# Altium PCB pcb.PcbDoc (part 5 of 9)
Units mil, origin at the board's own origin, x right, y up, seen from the top; angles counter-clockwise.
Board outline 3937.01 x 3937.01 mil, 4 copper layers (Top Layer, Ground plane, Power plane, Bottom Layer), stack 51.4 mil thick; 310 components, 276 nets, 1704 pads, 977 vias.
Unrouted connection lines stored in the file: 44.
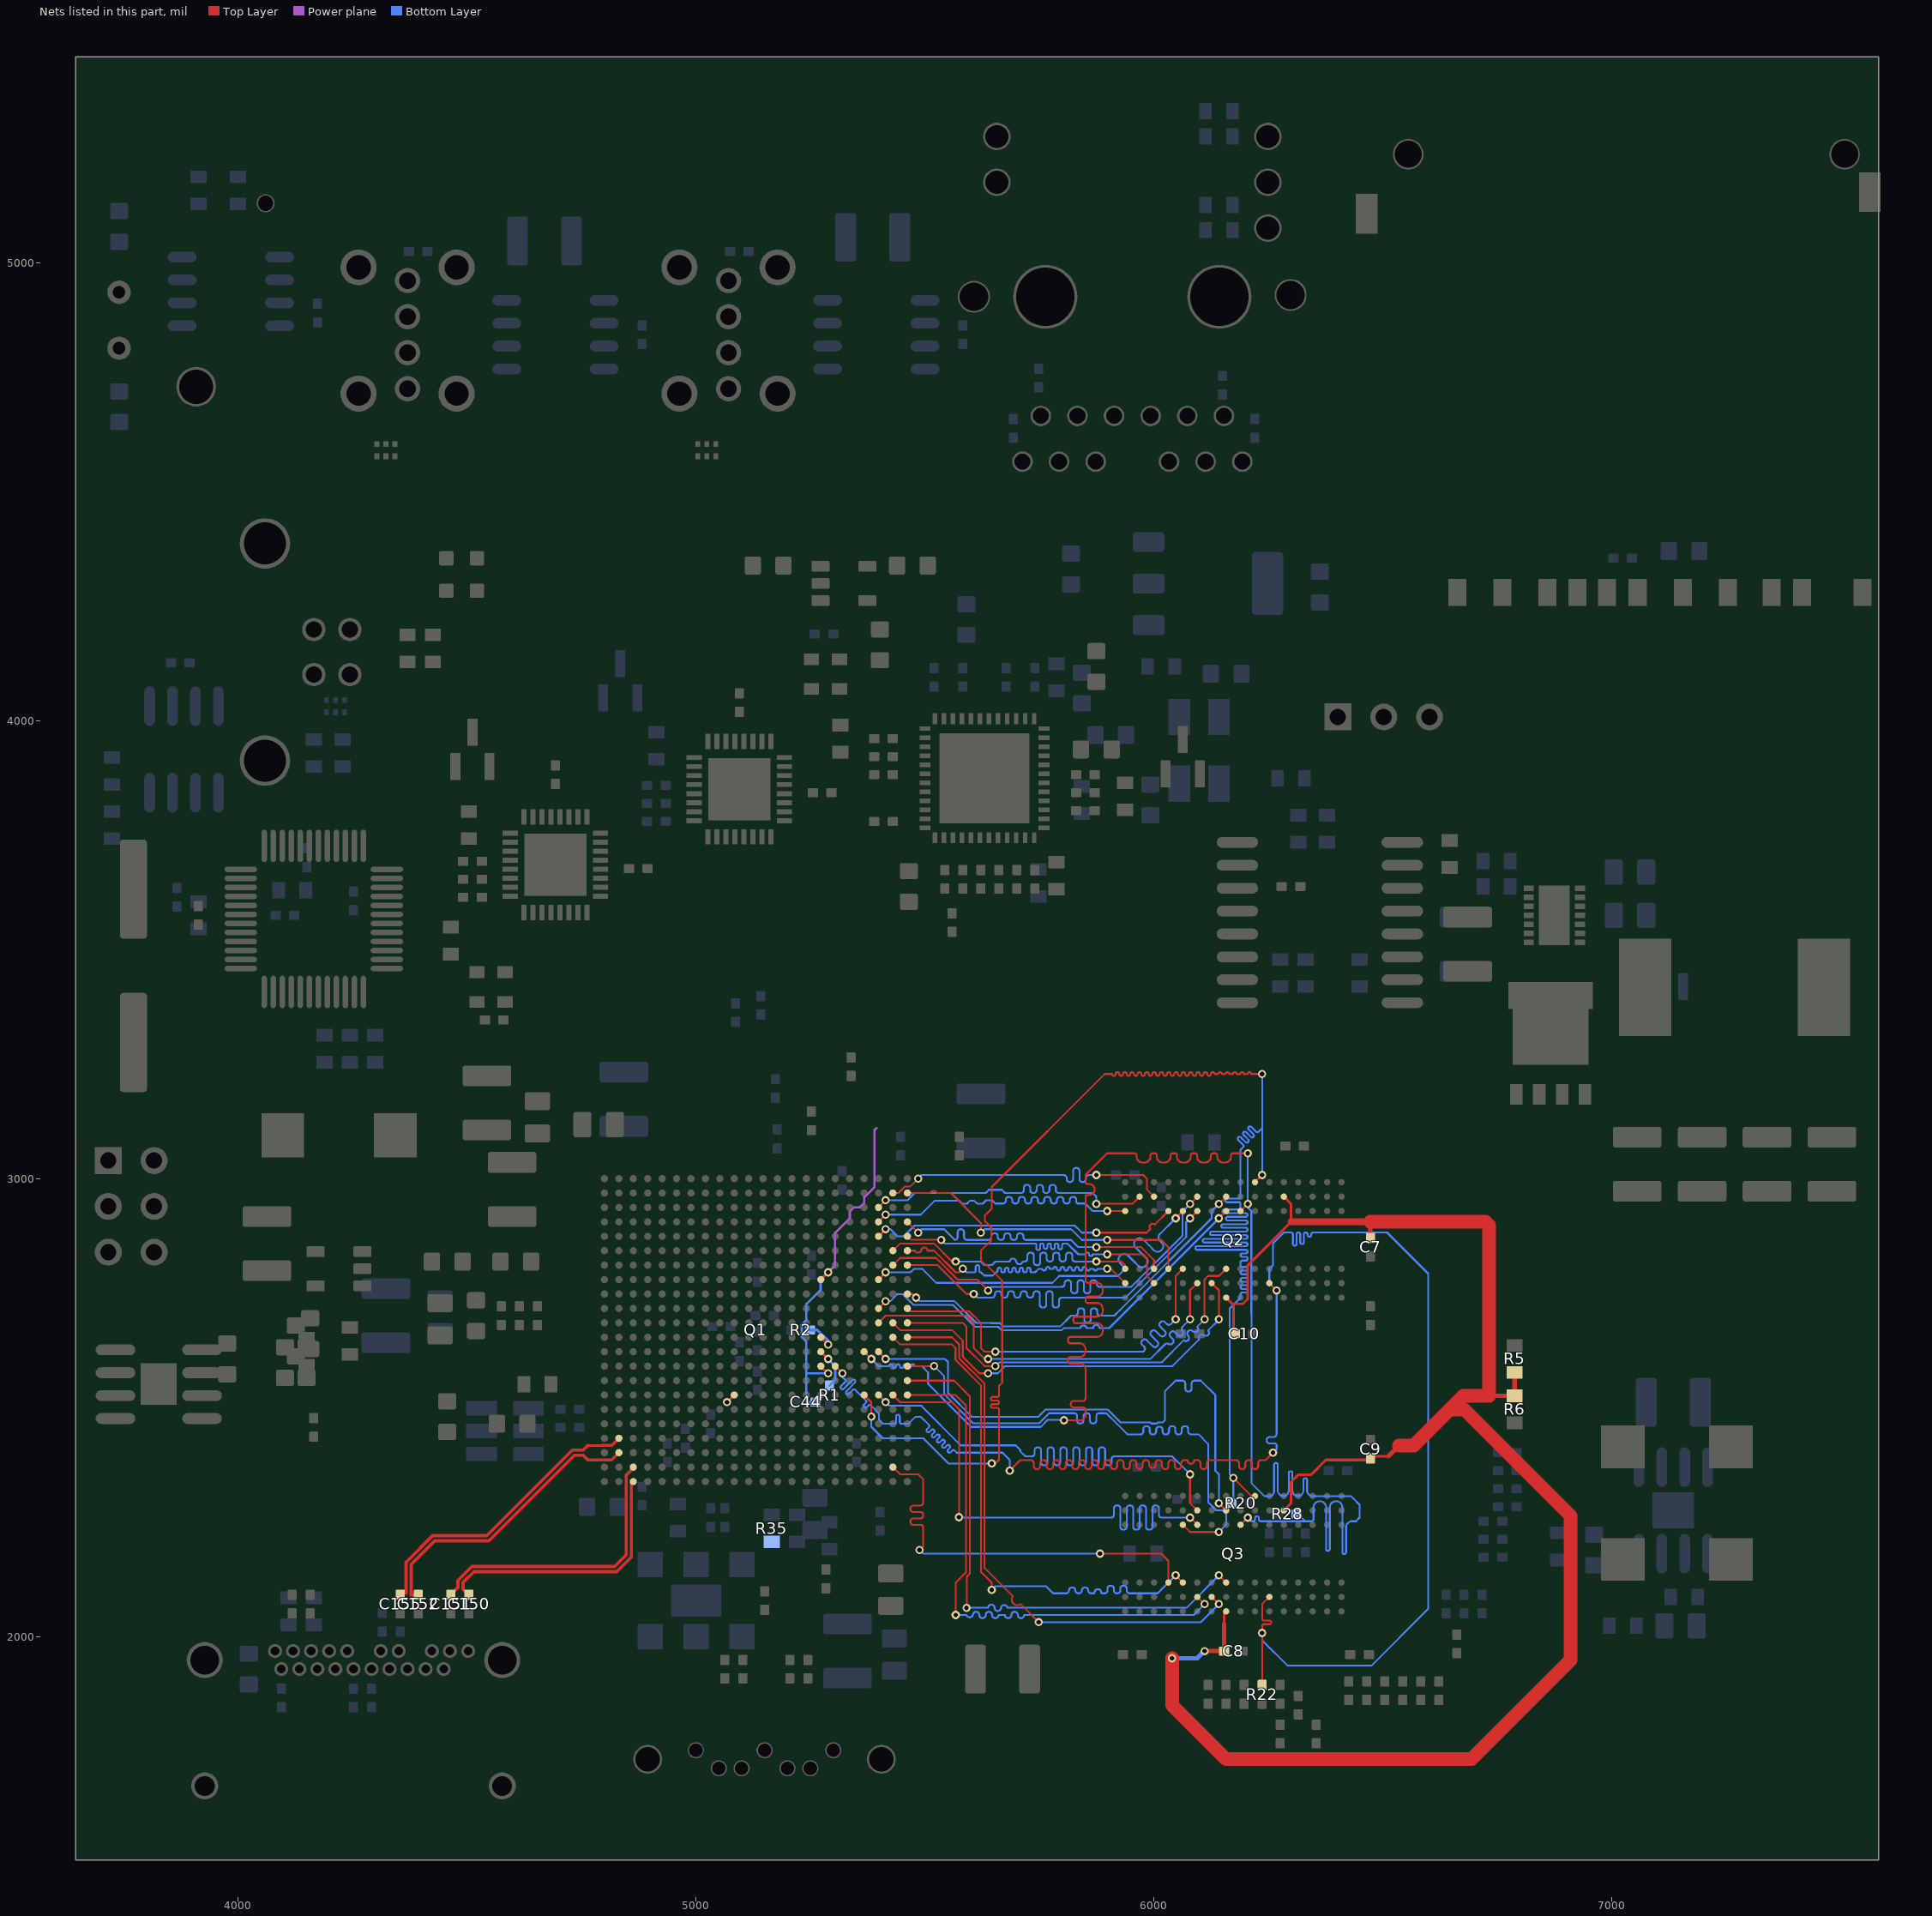
[diagram p6: the nets of this part, all layers, seen from the top]

## Via types
v1: diameter 18, hole 10, Top Layer to Bottom Layer, 932 vias
v2: diameter 19.68, hole 9.84, Top Layer to Bottom Layer, tented both sides, 18 vias
v3: diameter 19.68, hole 9.84, Top Layer to Bottom Layer, 16 vias
v4: diameter 19.68, hole 7.87, Top Layer to Bottom Layer, 11 vias

## Nets (pads, with @x,y where several pads share a name; then routed paths per layer and width w, separated by ;. In a path a pad name is that pad's centre, name@x,y a point inside that pad or via, vN(x,y) a via of type N, cw(c..) or ccw(c..) an arc to the next point about the centre after c; other vN are vias at no path point) (continued)
CK_P: Q1.N19 Q2.J7 Q3.J7 R28.1 | length 4126
  Top Layer w4: Q1.N19@5366.93,2622.05 v1(5382.68,2606.3) ; v1(5803.15,2472.44) 5842.52,2472.44 5850.39,2480.31 5850.39,2494.83 ccw(c5844.79,2494.83) 5844.79,2500.43 5824.09,2500.43 cw(c5824.09,2506.03) 5818.49,2506.03 5818.49,2508.83 cw(c5824.09,2508.83) 5824.09,2514.43 5844.79,2514.43 ccw(c5844.79,2520.03) 5850.39,2520.03 5850.39,2551.99 5850.39,2559.99 5850.39,2583.59 ccw(c5837.58,2583.59) 5837.58,2596.4 5817.43,2596.4 cw(c5817.43,2601.2) 5812.64,2601.2 5812.64,2605.6 cw(c5817.43,2605.6) 5817.43,2610.4 5837.58,2610.4 ccw(c5837.58,2623.22) 5850.39,2623.22 5850.39,2627.62 ccw(c5837.58,2627.62) 5837.58,2640.43 5817.43,2640.43 cw(c5817.43,2645.23) 5812.64,2645.23 5812.64,2649.64 cw(c5817.43,2649.64) 5817.43,2654.43 5875.34,2654.43 ccw(c5875.34,2667.25) 5888.15,2667.25 5888.15,2671.65 ccw(c5875.34,2671.65) 5875.34,2684.46 5828.82,2684.46 cw(c5828.82,2689.26) 5824.02,2689.26 5824.02,2693.67 cw(c5828.82,2693.67) 5828.82,2698.46 5875.34,2698.46 ccw(c5875.34,2711.28) 5888.15,2711.28 5888.15,2715.68 ccw(c5875.34,2715.68) 5875.34,2728.5 5855.19,2728.5 cw(c5855.19,2733.29) 5850.39,2733.29 5850.39,2737.7 cw(c5855.19,2737.7) 5855.19,2742.5 5875.34,2742.5 ccw(c5875.34,2755.31) 5888.15,2755.31 5888.15,2759.71 ccw(c5875.34,2759.71) 5875.34,2772.53 5855.19,2772.53 cw(c5855.19,2777.33) 5850.39,2777.33 5850.39,2834.65 5850.39,2960.13 cw(c5854.39,2960.13) 5854.39,2964.13 5858.39,2964.13 ccw(c5858.39,2976.13) 5870.39,2976.13 ccw(c5858.39,2976.13) 5858.39,2988.13 5854.39,2988.13 cw(c5854.39,2992.13) 5850.39,2992.13 5850.39,3007.87 5897.64,3055.12 5957.3,3055.12 cw(c5957.3,3050.32) 5962.1,3050.32 5962.1,3047.92 ccw(c5974.9,3047.92) 5974.9,3035.12 5979.3,3035.12 ccw(c5979.3,3047.92) 5992.1,3047.92 5992.1,3050.32 cw(c5996.9,3050.32) 5996.9,3055.12 6001.3,3055.12 cw(c6001.3,3050.32) 6006.1,3050.32 6006.1,3047.92 ccw(c6018.9,3047.92) 6018.9,3035.12 6023.3,3035.12 ccw(c6023.3,3047.92) 6036.1,3047.92 6036.1,3050.32 cw(c6040.9,3050.32) 6040.9,3055.12 6045.3,3055.12 cw(c6045.3,3050.32) 6050.1,3050.32 6050.1,3047.92 ccw(c6062.9,3047.92) 6062.9,3035.12 6067.3,3035.12 ccw(c6067.3,3047.92) 6080.1,3047.92 6080.1,3050.32 cw(c6084.9,3050.32) 6084.9,3055.12 6089.3,3055.12 cw(c6089.3,3050.32) 6094.1,3050.32 6094.1,3047.92 ccw(c6106.9,3047.92) 6106.9,3035.12 6111.3,3035.12 ccw(c6111.3,3047.92) 6124.1,3047.92 6124.1,3050.32 cw(c6128.9,3050.32) 6128.9,3055.12 6133.3,3055.12 cw(c6133.3,3050.32) 6138.1,3050.32 6138.1,3047.92 ccw(c6150.9,3047.92) 6150.9,3035.12 6155.3,3035.12 ccw(c6155.3,3047.92) 6168.1,3047.92 6168.1,3050.32 cw(c6172.9,3050.32) 6172.9,3055.12 v1(6204.72,3055.12) ; Q3.J7@6188.98,2244.09 v1(6204.72,2259.84) ; Q2.J7@6188.98,2929.13 v1(6204.72,2944.88)
  Bottom Layer w4: v1(5382.68,2606.3) 5398.43,2590.55 5421.04,2590.55 cw(c5425.04,2590.55) 5429.04,2590.55 ccw(c5433.04,2590.55) 5437.04,2590.55 cw(c5441.04,2590.55) 5445.04,2590.55 ccw(c5449.04,2590.55) 5453.04,2590.55 cw(c5457.04,2590.55) 5461.04,2590.55 ccw(c5465.04,2590.55) 5469.04,2590.55 cw(c5473.04,2590.55) 5477.04,2590.55 5492.91,2590.55 5506.66,2576.8 5506.66,2551.9 5600.73,2457.83 5752.69,2457.83 5768.33,2473.47 5794.24,2473.47 5795.28,2472.44 v1(5803.15,2472.44) ; v1(6204.72,2259.84) 6212.6,2251.97 6216.79,2251.97 ccw(c6216.79,2255.97) 6220.79,2255.97 6220.79,2258.79 cw(c6224.79,2258.79) 6224.79,2262.79 cw(c6224.79,2258.79) 6228.79,2258.79 6228.79,2255.97 ccw(c6232.79,2255.97) 6232.79,2251.97 6240.79,2251.97 6251.97,2251.97 6330.71,2251.97 ; v1(6204.72,3055.12) v1(6204.72,2944.88) 6204.72,2937.01 6212.6,2929.13 6212.6,2704.23 6212.72,2704.1 6212.72,2335.02 6240.78,2306.96 6251.97,2306.96 ccw(c6251.97,2317.2) 6262.2,2317.2 6262.2,2375.34 cw(c6266.2,2375.34) 6270.2,2375.34 6270.2,2318.96 ccw(c6282.2,2318.96) 6294.2,2318.96 6294.2,2357.03 cw(c6298.2,2357.03) 6302.2,2357.03 6302.2,2318.96 ccw(c6314.2,2318.96) 6326.2,2318.96 6326.2,2342.21 cw(c6330.2,2342.21) 6334.2,2342.21 6334.2,2318.96 ccw(c6346.2,2318.96) 6346.2,2306.96 6429.76,2306.96 6435.29,2301.43 6448.82,2287.9 6448.82,2259.84 6440.94,2251.97 6433.07,2251.97 ccw(c6433.07,2238.22) 6419.32,2238.22 6419.32,2184.36 cw(c6415.32,2184.36) 6411.32,2184.36 6411.32,2281.9 ccw(c6397.57,2281.9) 6383.83,2281.9 6383.83,2191.06 cw(c6379.83,2191.06) 6375.83,2191.06 6375.83,2281.9 ccw(c6362.08,2281.9) 6348.33,2281.9 6348.33,2255.97 cw(c6344.33,2255.97) 6344.33,2251.97 6330.71,2251.97 ; R28.1@6311.61,2275.59 6311.61,2271.06 6330.71,2251.97
CKE: Q1.T19 Q2.K9 Q3.K9 R20.1 | length 4253.8
  Top Layer w4: Q1.T19@5366.93,2527.56 5382.68,2511.81 v1(5382.68,2480.32) ; v1(5645.67,2377.95) 5653.54,2377.95 5661.66,2386.07 5661.66,2495.43 ccw(c5657.66,2495.43) 5657.66,2499.43 5647.8,2499.43 cw(c5647.8,2503.43) 5643.8,2503.43 cw(c5647.8,2503.43) 5647.8,2507.43 5657.66,2507.43 ccw(c5657.66,2511.43) 5661.66,2511.43 ccw(c5657.66,2511.43) 5657.66,2515.43 5647.8,2515.43 cw(c5647.8,2519.43) 5643.8,2519.43 cw(c5647.8,2519.43) 5647.8,2523.43 5657.66,2523.43 ccw(c5657.66,2527.43) 5661.66,2527.43 5661.66,2547.49 5668.66,2554.49 5668.66,2776.87 5633.76,2811.77 5631.58,2811.77 5622.05,2821.31 5622.05,2842.52 5644.8,2865.27 5644.8,2892.79 5630.54,2907.05 5630.54,2919.47 5645.67,2934.6 5645.67,2981.72 5892.3,3228.35 5908.22,3228.35 ccw(c5912.22,3228.35) 5916.22,3228.35 cw(c5920.22,3228.35) 5924.22,3228.35 ccw(c5928.22,3228.35) 5932.22,3228.35 cw(c5936.22,3228.35) 5940.22,3228.35 ccw(c5944.22,3228.35) 5948.22,3228.35 cw(c5952.22,3228.35) 5956.22,3228.35 ccw(c5960.22,3228.35) 5964.22,3228.35 cw(c5968.22,3228.35) 5972.22,3228.35 ccw(c5976.22,3228.35) 5980.22,3228.35 cw(c5984.22,3228.35) 5988.22,3228.35 ccw(c5992.22,3228.35) 5996.22,3228.35 cw(c6000.22,3228.35) 6004.22,3228.35 ccw(c6008.22,3228.35) 6012.22,3228.35 cw(c6016.22,3228.35) 6020.22,3228.35 ccw(c6024.22,3228.35) 6028.22,3228.35 cw(c6032.22,3228.35) 6036.22,3228.35 ccw(c6040.22,3228.35) 6044.22,3228.35 cw(c6048.22,3228.35) 6052.22,3228.35 ccw(c6056.22,3228.35) 6060.22,3228.35 cw(c6064.22,3228.35) 6068.22,3228.35 ccw(c6072.22,3228.35) 6076.22,3228.35 cw(c6080.22,3228.35) 6084.22,3228.35 ccw(c6088.22,3228.35) 6092.22,3228.35 cw(c6096.22,3228.35) 6100.22,3228.35 ccw(c6104.22,3228.35) 6108.22,3228.35 cw(c6112.22,3228.35) 6116.22,3228.35 ccw(c6120.22,3228.35) 6124.22,3228.35 cw(c6128.22,3228.35) 6132.22,3228.35 6140.22,3228.35 cw(c6144.22,3228.35) 6148.22,3228.35 6156.22,3228.35 cw(c6160.22,3228.35) 6164.22,3228.35 6172.22,3228.35 cw(c6176.22,3228.35) 6180.22,3228.35 6188.22,3228.35 cw(c6192.22,3228.35) 6196.22,3228.35 6204.22,3228.35 cw(c6208.22,3228.35) 6212.22,3228.35 v1(6236.22,3228.35) ; v1(6173.23,2346.46) 6212.6,2307.09 Q3.K9@6220.47,2307.09 ; Q2.K9@6220.47,2992.13 v1(6236.22,3007.87)
  Bottom Layer w4: v1(5382.68,2480.32) 5382.68,2458.31 5407.92,2433.07 5496.06,2433.07 5551.18,2377.95 v1(5645.67,2377.95) ; R20.1@6168.7,2291.34 6173.23,2295.87 v1(6173.23,2346.46) 6165.23,2354.46 6165.23,2716.41 6188.98,2740.16 6188.98,2747.02 cw(c6192.98,2747.02) 6192.98,2751.02 6200.6,2751.02 ccw(c6200.6,2755.02) 6204.6,2755.02 ccw(c6200.6,2755.02) 6200.6,2759.02 6192.98,2759.02 cw(c6192.98,2763.02) 6188.98,2763.02 cw(c6192.98,2763.02) 6192.98,2767.02 6200.6,2767.02 ccw(c6200.6,2771.02) 6204.6,2771.02 ccw(c6200.6,2771.02) 6200.6,2775.02 6192.98,2775.02 cw(c6192.98,2779.02) 6188.98,2779.02 cw(c6192.98,2779.02) 6192.98,2783.02 6200.6,2783.02 ccw(c6200.6,2787.02) 6204.6,2787.02 ccw(c6200.6,2787.02) 6200.6,2791.02 6192.98,2791.02 cw(c6192.98,2795.02) 6188.98,2795.02 cw(c6192.98,2795.02) 6192.98,2799.02 6200.6,2799.02 ccw(c6200.6,2803.02) 6204.6,2803.02 ccw(c6200.6,2803.02) 6200.6,2807.02 6192.98,2807.02 cw(c6192.98,2811.02) 6188.98,2811.02 6188.98,2817.01 cw(c6192.98,2817.01) 6192.98,2821.01 6200.6,2821.01 ccw(c6200.6,2825.01) 6204.6,2825.01 ccw(c6200.6,2825.01) 6200.6,2829.01 6192.98,2829.01 cw(c6192.98,2833.01) 6188.98,2833.01 cw(c6192.47,2833.01) 6192.47,2836.5 6200.25,2836.5 ccw(c6200.25,2840.5) 6204.25,2840.5 ccw(c6200.25,2840.5) 6200.25,2844.5 6094.17,2844.5 cw(c6094.17,2848.5) 6090.17,2848.5 cw(c6094.17,2848.5) 6094.17,2852.5 6200.25,2852.5 ccw(c6200.25,2856.5) 6204.25,2856.5 ccw(c6200.25,2856.5) 6200.25,2860.5 6110.17,2860.5 cw(c6110.17,2864.5) 6106.17,2864.5 cw(c6110.17,2864.5) 6110.17,2868.5 6200.25,2868.5 ccw(c6200.25,2872.5) 6204.25,2872.5 ccw(c6200.25,2872.5) 6200.25,2876.5 6126.17,2876.5 cw(c6126.17,2880.5) 6122.17,2880.5 cw(c6126.17,2880.5) 6126.17,2884.5 6200.25,2884.5 ccw(c6200.25,2888.5) 6204.25,2888.5 ccw(c6200.25,2888.5) 6200.25,2892.5 6150.8,2892.5 cw(c6150.8,2896.5) 6146.8,2896.5 cw(c6150.8,2896.5) 6150.8,2900.5 6200.25,2900.5 ccw(c6200.25,2904.5) 6204.25,2904.5 ccw(c6200.25,2904.5) 6200.25,2908.5 6161.06,2908.5 cw(c6161.06,2912.5) 6157.06,2912.5 cw(c6161.06,2912.5) 6161.06,2916.5 6200.25,2916.5 ccw(c6200.25,2920.5) 6204.25,2920.5 ccw(c6200.25,2920.5) 6200.25,2924.5 6153.59,2924.5 cw(c6153.59,2928.5) 6149.59,2928.5 cw(c6153.59,2928.5) 6153.59,2932.5 6184.98,2932.5 ccw(c6184.98,2936.5) 6188.98,2936.5 6188.98,2944.5 ccw(c6184.98,2944.5) 6184.98,2948.5 6159.13,2948.5 cw(c6159.13,2952.5) 6155.13,2952.5 cw(c6159.13,2952.5) 6159.13,2956.5 6184.98,2956.5 ccw(c6184.98,2960.5) 6188.98,2960.5 6188.98,3062.99 6194.41,3068.42 ccw(c6191.58,3071.25) 6194.41,3074.08 6184.02,3084.46 cw(c6186.85,3087.29) 6184.02,3090.12 cw(c6186.85,3087.29) 6189.68,3090.12 6200.06,3079.73 ccw(c6202.89,3082.56) 6205.72,3079.73 ccw(c6202.89,3082.56) 6205.72,3085.39 6195.34,3095.77 cw(c6198.17,3098.6) 6195.34,3101.43 cw(c6198.17,3098.6) 6200.99,3101.43 6211.38,3091.05 ccw(c6214.2,3093.88) 6217.03,3091.05 ccw(c6214.2,3093.88) 6217.03,3096.71 6206.65,3107.09 cw(c6209.48,3109.92) 6206.65,3112.74 cw(c6209.48,3109.92) 6212.31,3112.74 6222.69,3102.36 ccw(c6225.52,3105.19) 6228.35,3102.36 6236.22,3110.24 ; v1(6236.22,3007.87) 6236.22,3110.24 ; v1(6236.22,3228.35) 6236.22,3110.24
CS: Q1.P17 Q2.L2 Q3.L2 R22.1 | length 4204.7
  Top Layer w4: Q1.P17@5303.94,2590.55 v1(5319.69,2574.8) ; v1(5685.04,2362.2) 5708.41,2385.57 5730.54,2385.57 cw(c5730.54,2378.57) 5737.54,2378.57 5737.54,2372.57 ccw(c5744.54,2372.57) 5744.54,2365.57 ccw(c5744.54,2372.57) 5751.54,2372.57 5751.54,2378.57 cw(c5758.54,2378.57) 5758.54,2385.57 cw(c5758.54,2378.57) 5765.54,2378.57 5765.54,2372.57 ccw(c5772.54,2372.57) 5772.54,2365.57 ccw(c5772.54,2372.57) 5779.54,2372.57 5779.54,2378.57 cw(c5786.54,2378.57) 5786.54,2385.57 cw(c5786.54,2378.57) 5793.54,2378.57 5793.54,2372.57 ccw(c5800.54,2372.57) 5800.54,2365.57 ccw(c5800.54,2372.57) 5807.54,2372.57 5807.54,2378.57 cw(c5814.54,2378.57) 5814.54,2385.57 cw(c5814.54,2378.57) 5821.54,2378.57 5821.54,2372.57 ccw(c5828.54,2372.57) 5828.54,2365.57 ccw(c5828.54,2372.57) 5835.54,2372.57 5835.54,2378.57 cw(c5842.54,2378.57) 5842.54,2385.57 cw(c5842.54,2378.57) 5849.54,2378.57 5849.54,2372.57 ccw(c5856.54,2372.57) 5856.54,2365.57 ccw(c5856.54,2372.57) 5863.54,2372.57 5863.54,2378.57 cw(c5870.54,2378.57) 5870.54,2385.57 cw(c5870.54,2378.57) 5877.54,2378.57 5877.54,2372.57 ccw(c5884.54,2372.57) 5884.54,2365.57 ccw(c5884.54,2372.57) 5891.54,2372.57 5891.54,2378.57 cw(c5898.54,2378.57) 5898.54,2385.57 cw(c5898.54,2378.57) 5905.54,2378.57 5905.54,2372.57 ccw(c5912.54,2372.57) 5912.54,2365.57 ccw(c5912.54,2372.57) 5919.54,2372.57 5919.54,2378.57 cw(c5926.54,2378.57) 5926.54,2385.57 cw(c5926.54,2378.57) 5933.54,2378.57 5933.54,2372.57 ccw(c5940.54,2372.57) 5940.54,2365.57 ccw(c5940.54,2372.57) 5947.54,2372.57 5947.54,2378.57 cw(c5954.54,2378.57) 5954.54,2385.57 cw(c5954.54,2378.57) 5961.54,2378.57 5961.54,2373.06 ccw(c5968.54,2373.06) 5968.54,2366.06 ccw(c5968.54,2373.06) 5975.54,2373.06 5975.54,2378.57 cw(c5982.54,2378.57) 5982.54,2385.57 cw(c5982.54,2378.57) 5989.54,2378.57 5989.54,2375.17 ccw(c5996.54,2375.17) 5996.54,2368.17 ccw(c5996.54,2375.17) 6003.54,2375.17 6003.54,2378.57 cw(c6010.54,2378.57) 6010.54,2385.57 cw(c6010.54,2378.57) 6017.54,2378.57 6017.54,2372.57 ccw(c6024.54,2372.57) 6024.54,2365.57 ccw(c6024.54,2372.57) 6031.54,2372.57 6031.54,2378.57 cw(c6038.54,2378.57) 6038.54,2385.57 cw(c6038.54,2378.57) 6045.54,2378.57 6045.54,2372.57 ccw(c6052.54,2372.57) 6052.54,2365.57 ccw(c6052.54,2372.57) 6059.54,2372.57 6059.54,2378.57 cw(c6066.54,2378.57) 6066.54,2385.57 6072.29,2385.57 cw(c6072.29,2384.33) 6073.54,2384.33 ccw(c6080.54,2384.33) 6080.54,2377.33 ccw(c6080.54,2384.33) 6087.54,2384.33 cw(c6088.78,2384.33) 6088.78,2385.57 6094.54,2385.57 cw(c6094.54,2378.57) 6101.54,2378.57 6101.54,2372.57 ccw(c6108.54,2372.57) 6108.54,2365.57 ccw(c6108.54,2372.57) 6115.54,2372.57 6115.54,2378.57 cw(c6122.54,2378.57) 6122.54,2385.57 6178.54,2385.57 cw(c6178.54,2378.57) 6185.54,2378.57 6185.54,2372.57 ccw(c6192.54,2372.57) 6192.54,2365.57 ccw(c6192.54,2372.57) 6199.54,2372.57 6199.54,2378.57 cw(c6206.54,2378.57) 6206.54,2385.57 cw(c6206.54,2378.57) 6213.54,2378.57 6213.54,2372.57 ccw(c6220.54,2372.57) 6220.54,2365.57 ccw(c6220.54,2372.57) 6227.54,2372.57 6227.54,2378.57 cw(c6234.54,2378.57) 6234.54,2385.57 6243.84,2385.57 v1(6259.84,2401.57) ; R22.1@6236.22,1897.64 v1(6236.22,2007.87) 6236.22,2023.12 cw(c6240.22,2023.12) 6240.22,2027.12 6252.03,2027.12 ccw(c6252.03,2031.12) 6256.03,2031.12 ccw(c6252.03,2031.12) 6252.03,2035.12 6240.22,2035.12 cw(c6240.22,2039.12) 6236.22,2039.12 6236.22,2070.87 Q3.L2@6251.97,2086.61 ; Q2.L2@6251.97,2771.65 v1(6267.72,2755.91)
  Bottom Layer w4: v1(5319.69,2574.8) 5319.69,2566.93 5325.34,2561.27 cw(c5322.51,2558.44) 5325.34,2555.61 5316.86,2547.13 ccw(c5319.69,2544.3) 5316.86,2541.47 ccw(c5319.69,2544.3) 5322.51,2541.47 5333.83,2552.79 5341.11,2560.07 cw(c5343.94,2557.24) 5346.77,2560.07 cw(c5343.94,2557.24) 5346.77,2554.41 5328.17,2535.82 ccw(c5331,2532.99) 5328.17,2530.16 ccw(c5331,2532.99) 5333.83,2530.16 5342.31,2538.64 cw(c5345.14,2535.82) 5347.97,2538.64 5370.6,2516.02 cw(c5367.77,2513.19) 5370.6,2510.36 5367.05,2506.81 ccw(c5369.88,2503.98) 5367.05,2501.16 ccw(c5369.88,2503.98) 5372.71,2501.16 5376.25,2504.7 cw(c5379.08,2501.87) 5381.91,2504.7 5399.17,2487.44 5399.17,2474.1 5408.71,2464.57 5432.71,2464.57 ccw(c5432.71,2468.57) 5436.71,2468.57 5436.71,2480.57 cw(c5440.71,2480.57) 5440.71,2484.57 cw(c5440.71,2480.57) 5444.71,2480.57 5444.71,2468.57 ccw(c5448.71,2468.57) 5448.71,2464.57 5463.83,2464.57 5478.83,2479.57 5491.25,2479.57 5508.22,2462.6 cw(c5505.39,2459.77) 5508.22,2456.94 5504.35,2453.07 ccw(c5507.18,2450.24) 5504.35,2447.41 ccw(c5507.18,2450.24) 5510.01,2447.41 5513.88,2451.28 cw(c5516.71,2448.45) 5519.54,2451.28 cw(c5516.71,2448.45) 5519.54,2445.63 5515.66,2441.75 ccw(c5518.49,2438.92) 5515.66,2436.1 ccw(c5518.49,2438.92) 5521.32,2436.1 5525.19,2439.97 cw(c5528.02,2437.14) 5530.85,2439.97 cw(c5528.02,2437.14) 5530.85,2434.31 5526.98,2430.44 ccw(c5529.81,2427.61) 5526.98,2424.78 ccw(c5529.81,2427.61) 5532.63,2424.78 5536.51,2428.66 cw(c5539.34,2425.83) 5542.16,2428.66 cw(c5539.34,2425.83) 5542.16,2423 5538.29,2419.13 ccw(c5541.12,2416.3) 5538.29,2413.47 ccw(c5541.12,2416.3) 5543.95,2413.47 5547.82,2417.34 cw(c5550.65,2414.51) 5553.48,2417.34 cw(c5550.65,2414.51) 5553.48,2411.68 5550.32,2408.53 ccw(c5553.15,2405.7) 5550.32,2402.87 ccw(c5553.15,2405.7) 5555.98,2402.87 5559.13,2406.03 cw(c5561.96,2403.2) 5564.79,2406.03 5569.12,2401.7 5669.17,2401.7 5685.04,2385.83 v1(5685.04,2362.2) ; v1(6236.22,2007.87) 6236.22,1992.13 6291.84,1936.5 6474.38,1936.5 6598.69,2060.81 6598.69,2792.61 6508.89,2882.4 6347.34,2882.4 ccw(c6347.34,2878.4) 6343.34,2878.4 6343.34,2877.02 cw(c6339.34,2877.02) 6339.34,2873.02 cw(c6339.34,2877.02) 6335.34,2877.02 6335.34,2878.4 ccw(c6331.34,2878.4) 6331.34,2882.4 ccw(c6331.34,2878.4) 6327.34,2878.4 6327.34,2861.02 cw(c6323.34,2861.02) 6323.34,2857.02 cw(c6323.34,2861.02) 6319.34,2861.02 6319.34,2878.4 ccw(c6315.34,2878.4) 6315.34,2882.4 ccw(c6315.34,2878.4) 6311.34,2878.4 6311.34,2857.44 cw(c6307.34,2857.44) 6307.34,2853.44 cw(c6307.34,2857.44) 6303.34,2857.44 6303.34,2878.4 ccw(c6299.34,2878.4) 6299.34,2882.4 6283.98,2882.4 6259.84,2858.27 6259.84,2811.02 6251.97,2803.15 6251.97,2771.65 v1(6267.72,2755.91) 6267.72,2442.69 cw(c6260.72,2442.69) 6260.72,2435.69 6252.77,2435.69 ccw(c6252.77,2428.69) 6245.77,2428.69 ccw(c6252.77,2428.69) 6252.77,2421.69 6263.35,2421.69 cw(c6263.35,2417.32) 6267.72,2417.32 6267.72,2409.45 v1(6259.84,2401.57)
D0_N: C151.2 Q1.AA3 | length 626.6
  Top Layer w7.2: C151.2@4464.57,2091.14 4480.31,2106.88 4480.31,2122.76 4510.5,2152.95 4822.24,2152.95 4847.52,2178.23 4847.52,2352.59 4862.99,2368.07 Q1.AA3@4862.99,2370.08
D0_P: C150.2 Q1.AB3 | length 589.1
  Top Layer w7.2: C150.2@4503.94,2091.14 4491.52,2103.56 4491.52,2118.11 4515.14,2141.73 4826.89,2141.73 4858.73,2173.58 4858.73,2334.32 Q1.AB3@4862.99,2338.58
D1_N: C155.2 Q1.W2 | length 644.2
  Top Layer w6: 4763.78,2417.32 4795.28,2417.32
  Top Layer w7.2: 4366.74,2094.49 4366.74,2162.13 4370.02,2165.41 4425.08,2220.47 4543.19,2220.47 4729.9,2407.18 4753.64,2407.18 4763.78,2417.32 ; 4795.55,2417.6 4816.02,2417.6 Q1.W2@4831.5,2433.07
D1_P: C152.2 Q1.Y2 | length 645.1
  Top Layer w6: 4763.78,2385.83 4795.28,2385.83
  Top Layer w7.2: C152.2@4393.7,2091.14 4377.94,2091.14 4377.94,2094.48 4377.95,2157.48 4429.73,2209.26 4547.84,2209.26 4734.55,2395.97 4753.64,2395.97 4763.78,2385.83 ; 4795.28,2385.83 4815.75,2385.83 Q1.Y2@4831.5,2401.57
DDRREF: C7.2 C8.2 C9.2 C10.2 C44.2 Q1.H16 Q1.P16 Q2.H1 Q2.M8 Q3.H1 Q3.M8 R5.2 R6.2 | length 4710.4
  Top Layer w5: Q1.P16@5272.44,2590.55 v1(5288.19,2574.8) ; Q1.H16@5272.44,2779.53 v1(5288.19,2795.28) ; C10.2@6173.48,2664.52 C10.2@6176.57,2661.42 ; 6173.48,2724.16 6170.87,2726.77 6194.52,2726.77 6204.72,2736.97 ; 6299.21,2905.51 6299.21,2944.88
  Top Layer w6: 6152.95,2026.97 6152.95,2050.59 Q3.H1@6157.48,2055.12 Q3.H1@6157.48,2051.18 ; Q2.H1@6157.48,2740.16 6170.87,2726.77 ; C10.2@6173.48,2664.52 6173.48,2724.16 ; 6204.72,2736.97 6204.72,2811.02 6299.21,2905.51 ; Q3.M8@6283.47,2275.59 6299.21,2291.34 6299.21,2337.46 6314.96,2353.2 6342.31,2353.2 6374.93,2385.83 6469.09,2385.83 C9.2@6472.44,2389.17 ; Q2.M8@6283.47,2960.63 6299.21,2944.88 ; C9.2@6476.97,2393.7 6511.81,2393.7
  Top Layer w10: v1(6110.24,1968.5) C8.2@6152.95,1968.5 6152.95,2026.97 ; C9.2@6472.44,2389.17 C9.2@6476.97,2393.7 ; C7.2@6472.44,2870.67 6472.44,2905.51 ; 6511.81,2393.7 6535.43,2417.32 ; 6731.3,2525.59 R6.2@6787.4,2525.59 R5.2@6787.4,2576.77
  Top Layer w15: 6299.21,2905.51 6472.44,2905.51 ; 6724.41,2905.51 6731.3,2898.62
  Top Layer w30: v1(6039.37,1952.76) 6039.37,1850.39 6157.48,1732.28 6692.91,1732.28 6909.89,1949.26 6909.89,2263.57 6677.39,2496.06 6645.67,2496.06 ; 6472.44,2905.51 6724.41,2905.51 ; 6535.43,2417.32 6566.93,2417.32 6645.67,2496.06 ; 6731.3,2898.62 6731.3,2525.59 6675.2,2525.59 6645.67,2496.06
  Power plane w5: v1(5288.19,2795.28) 5303.69,2810.77 5303.69,2881.64 5335.68,2913.63 5335.68,2928.18 5344.76,2937.26 5357.6,2937.26 5367.18,2946.84 5367.18,2959.18 5389.7,2981.7 5389.7,3106.24 5393.7,3110.24
  Bottom Layer w5: 5240.95,2574.8 v1(5288.19,2574.8) ; C44.2@5260.43,2511.81 5240.94,2511.81 5240.94,2643.97 5230.9,2654.01 5230.9,2680.67 5240.94,2690.72 5240.94,2726.11 5272.19,2757.36 5272.19,2779.28 v1(5288.19,2795.28)
  Bottom Layer w10: v1(6039.37,1952.76) 6094.49,1952.76 v1(6110.24,1968.5)
DDRVRN: Q1.M16 R2.2 | length 79.5
  Top Layer w5: Q1.M16@5272.44,2653.54 v1(5288.19,2637.79)
  Bottom Layer w5: v1(5288.19,2637.79) v1@5288.19,2645.67
  Bottom Layer w6: R2.2@5248.62,2669.29 5264.57,2669.29 v1@5288.19,2645.67
DDRVRP: Q1.N16 R1.2 | length 92.5
  Top Layer w5: Q1.N16@5272.44,2622.05 v1(5288.19,2606.3)
  Bottom Layer w5: v1(5288.19,2606.3) 5303.94,2590.55 5303.94,2560.43 R1.2@5291.34,2547.83
DM0: Q1.H20 Q2.E7 | length 925.3
  Top Layer w4: Q1.H20@5398.43,2779.53 v1(5414.17,2795.28) ; v1(6047.24,2913.39) Q2.E7@6062.99,2929.13
  Bottom Layer w4: v1(5414.17,2795.28) 5468.26,2795.28 5475.51,2802.53 5494.57,2802.53 5524.69,2772.4 5777.87,2772.4 5792.87,2787.4 5921.26,2787.4 5929.98,2796.12 ; 5929.99,2796.13 ccw(c5922.35,2803.76) 5929.99,2811.39 5925.55,2815.83 cw(c5933.19,2823.47) 5925.54,2831.1 5927.25,2832.8 cw(c5934.88,2825.17) 5942.52,2832.8 5954.59,2820.73 5966.15,2809.17 ccw(c5973.78,2816.81) 5981.42,2809.17 5983.12,2810.87 ccw(c5975.48,2818.51) 5983.12,2826.14 5971.56,2837.7 5959.49,2849.77 cw(c5967.13,2857.41) 5959.48,2865.04 5961.19,2866.74 cw(c5968.82,2859.11) 5976.46,2866.74 5988.53,2854.67 6000.09,2843.12 ccw(c6007.72,2850.75) 6015.35,2843.11 6017.06,2844.81 ccw(c6009.42,2852.45) 6017.07,2860.08 6013.14,2864.01 cw(c6020.77,2871.64) 6013.13,2879.27 ; 6013.14,2879.28 v1(6047.24,2913.39)
DM1: Q1.B22 Q2.D3 | length 689
  Top Layer w4: Q1.B22@5461.42,2968.5 5511.81,2968.5 cw(c5518.81,2965.56) 5525.81,2968.5 5556.65,2968.5 5622.05,2903.1 v1(5622.05,2881.89) ; v1(5897.64,2866.14) 6015.75,2866.14 6031.5,2850.39 Q2.D3@6031.5,2803.15
  Bottom Layer w4: v1(5622.05,2881.89) 5629.67,2889.51 5819.15,2889.51 5842.52,2866.14 v1(5897.64,2866.14) v1@5897.51,2866.02
DM2: Q1.P22 Q3.E7 | length 1239.9
  Top Layer w4: Q1.P22@5461.42,2590.55 v1(5519.68,2590.55) ; Q3.E7@6062.99,2244.09 6078.74,2228.35 v1(6141.73,2228.35)
  Bottom Layer w4: v1(5519.68,2590.55) 5542.05,2568.19 5542.05,2528.82 5605.04,2465.83 5749.37,2465.83 5771.23,2487.68 5825.72,2487.68 cw(c5825.72,2481.39) 5832.02,2481.39 5832.02,2471.74 ccw(c5838.32,2471.74) 5838.32,2465.44 5839.72,2465.44 ccw(c5839.72,2471.74) 5846.02,2471.74 5846.02,2481.39 cw(c5852.32,2481.39) 5852.32,2487.69 5853.72,2487.68 cw(c5853.72,2481.39) 5860.02,2481.39 5860.02,2471.74 ccw(c5866.32,2471.74) 5866.32,2465.44 5867.72,2465.44 ccw(c5867.72,2471.74) 5874.02,2471.74 5874.02,2481.39 cw(c5880.32,2481.39) 5880.32,2487.69 5895.73,2487.68 5919.27,2464.15 ; 5919.27,2464.11 5941.68,2441.7 5970.38,2441.7 ccw(c5970.38,2448) 5976.68,2448 5976.68,2453.13 cw(c5982.98,2453.13) 5982.98,2459.43 5984.38,2459.43 cw(c5984.38,2453.13) 5990.68,2453.13 5990.68,2448 ccw(c5996.98,2448) 5996.98,2441.7 5998.38,2441.7 ccw(c5998.38,2448) 6004.68,2448 6004.68,2451.84 cw(c6010.98,2451.84) 6010.98,2458.14 6012.38,2458.14 cw(c6012.38,2451.84) 6018.68,2451.84 6018.68,2448 ccw(c6024.98,2448) 6024.98,2441.7 6026.38,2441.7 ccw(c6026.38,2448) 6032.68,2448 6032.68,2453.13 cw(c6038.98,2453.13) 6038.98,2459.43 6040.38,2459.43 cw(c6040.38,2453.13) 6046.68,2453.13 6046.68,2448 ccw(c6052.98,2448) 6052.98,2441.7 6054.38,2441.7 ccw(c6054.38,2448) 6060.68,2448 6060.68,2453.13 cw(c6066.98,2453.13) 6066.98,2459.43 6068.38,2459.43 cw(c6068.38,2453.13) 6074.68,2453.13 6074.68,2448 ccw(c6080.98,2448) 6080.98,2441.7 6097.17,2441.7 6118.24,2420.64 6118.24,2293.62 6136.27,2275.59 6149.61,2275.59 6157.48,2267.72 6157.48,2244.09 v1(6141.73,2228.35)
DM3: Q1.AA21 Q3.D3 | length 925.2
  Top Layer w4: Q1.AA21@5429.92,2370.08 5445.67,2354.33 5485.04,2354.33 5496.06,2343.31 5496.06,2292.39 cw(c5489.76,2292.39) 5489.76,2286.09 5474.45,2286.09 ccw(c5474.45,2279.79) 5468.15,2279.79 5468.15,2278.39 ccw(c5474.45,2278.39) 5474.45,2272.09 5489.76,2272.09 cw(c5489.76,2265.79) 5496.06,2265.79 5496.06,2264.39 cw(c5489.76,2264.39) 5489.76,2258.09 5474.45,2258.09 ccw(c5474.45,2251.79) 5468.15,2251.79 5468.15,2250.39 ccw(c5474.45,2250.39) 5474.45,2244.09 5489.76,2244.09 cw(c5489.76,2237.79) 5496.06,2237.79 5496.06,2196.85 v1(5488.19,2188.98) ; v1(5881.89,2181.1) 6015.75,2181.1 6031.5,2165.35 Q3.D3@6031.5,2118.11
  Bottom Layer w4: v1(5488.19,2188.98) 5496.06,2181.1 v1(5881.89,2181.1)
DONE: Q1.T10 R35.1 | length 22.3
  Top Layer w5: v1(5067.72,2511.81) Q1.T10@5083.46,2527.56
DQ0: Q1.K22 Q2.E3 | length 925.2
  Top Layer w4: Q1.K22@5461.42,2716.54 5467.67,2710.28 5596.8,2710.28 5622.05,2685.04 5622.05,2629.92 5629.92,2622.05 v1(5653.53,2622.04) ; v1(6047.24,2692.91) 6047.24,2787.4 Q2.E3@6062.99,2803.15
  Bottom Layer w4: v1(5653.53,2622.04) 5976.38,2622.05 5978.44,2624.11 ccw(c5973.99,2628.57) 5978.44,2633.02 5974.12,2637.35 cw(c5978.57,2641.8) 5974.12,2646.26 5975.11,2647.25 cw(c5979.56,2642.79) 5984.02,2647.25 5992.8,2638.47 5997.53,2633.74 ccw(c6001.98,2638.19) 6006.44,2633.74 6007.43,2634.73 ccw(c6002.97,2639.18) 6007.43,2643.64 6002.7,2648.37 5993.92,2657.15 cw(c5998.37,2661.6) 5993.92,2666.05 5994.91,2667.04 cw(c5999.36,2662.59) 6003.82,2667.04 6012.6,2658.27 6013.8,2657.06 ccw(c6018.25,2661.52) 6022.71,2657.06 6023.7,2658.05 ccw(c6019.24,2662.51) 6023.7,2666.96 6022.5,2668.16 6013.72,2676.94 cw(c6018.17,2681.4) 6013.72,2685.85 6014.71,2686.84 cw(c6019.16,2682.39) 6023.62,2686.84 6027.94,2682.52 ccw(c6032.39,2686.97) 6036.85,2682.52 v1(6047.24,2692.91)
DQ1: Q1.G22 Q2.F7 | length 925.2
  Top Layer w4: Q1.G22@5461.42,2811.02 5527.56,2811.02 5590.55,2748.03 v1(5606.3,2748.03) ; v1(6078.74,2913.39) Q2.F7@6094.49,2929.13
  Bottom Layer w4: v1(5606.3,2748.03) 5614.05,2740.28 5646.37,2740.28 ccw(c5646.37,2746.58) 5652.67,2746.58 5652.67,2747.74 cw(c5658.97,2747.74) 5658.97,2754.04 5660.37,2754.04 cw(c5660.37,2747.74) 5666.67,2747.74 5666.67,2746.58 ccw(c5672.97,2746.58) 5672.97,2740.28 5674.37,2740.28 ccw(c5674.37,2746.58) 5680.67,2746.58 5680.67,2747.74 cw(c5686.97,2747.74) 5686.97,2754.04 5688.37,2754.04 cw(c5688.37,2747.74) 5694.67,2747.74 5694.67,2746.58 ccw(c5700.97,2746.58) 5700.97,2740.28 5702.37,2740.28 ccw(c5702.37,2746.58) 5708.67,2746.58 5708.67,2747.74 cw(c5714.97,2747.74) 5714.97,2754.04 5716.37,2754.04 cw(c5716.37,2747.74) 5722.67,2747.74 5722.67,2746.58 ccw(c5728.97,2746.58) 5728.97,2740.28 5730.37,2740.28 ccw(c5730.37,2746.58) 5736.67,2746.58 5736.67,2747.74 cw(c5742.97,2747.74) 5742.97,2754.04 5744.37,2754.04 cw(c5744.37,2747.74) 5750.67,2747.74 5750.67,2724.7 ccw(c5756.97,2724.7) 5756.97,2718.4 5758.37,2718.41 ccw(c5758.37,2724.7) 5764.67,2724.7 5764.67,2747.74 cw(c5770.97,2747.74) 5770.97,2754.04 5772.37,2754.04 cw(c5772.37,2747.74) 5778.67,2747.74 5778.67,2724.7 ccw(c5784.97,2724.7) 5784.97,2718.4 5786.37,2718.41 ccw(c5786.37,2724.7) 5792.67,2724.7 5792.67,2733.98 cw(c5798.97,2733.98) 5798.97,2740.28 5938.16,2740.28 6070.24,2872.36 6070.24,2904.89 v1(6078.74,2913.39)
DQ2: Q1.L20 Q2.F2 | length 925.2
  Top Layer w4: Q1.L20@5398.43,2685.04 5414.17,2700.79 5590.55,2700.79 5606.3,2685.04 5606.3,2629.92 5629.92,2606.3 v1(5637.79,2606.3) ; v1(6078.74,2692.91) 6078.74,2755.91 Q2.F2@6094.49,2771.65
  Bottom Layer w4: v1(5637.79,2606.3) 5638.04,2606.55 5992.38,2606.55 6023.89,2638.06 cw(c6028.34,2633.61) 6032.8,2638.06 ; 6031.05,2639.81 ccw(c6035.51,2644.26) 6039.96,2639.81 6040.95,2640.8 ccw(c6036.5,2645.25) 6040.95,2649.71 6038.24,2652.42 6035.81,2654.85 cw(c6040.26,2659.31) 6035.81,2663.76 6036.8,2664.75 cw(c6041.25,2660.3) 6045.71,2664.75 6048.14,2662.32 6052.6,2657.86 ccw(c6057.05,2662.32) 6061.51,2657.86 6062.5,2658.85 ccw(c6058.04,2663.31) 6062.5,2667.76 cw(c6066.95,2672.22) 6062.5,2676.67 v1(6078.74,2692.91)
DQ3: Q1.G21 Q2.F8 | length 925.2
  Top Layer w4: Q1.G21@5429.92,2811.02 5445.67,2826.77 5524.12,2826.77 5571.36,2779.53 5614.17,2779.53 v1(5637.8,2755.91) ; v1(6078.74,2944.88) Q2.F8@6094.49,2960.63
  Bottom Layer w4: v1(5637.8,2755.91) 5645.67,2763.78 5798.71,2763.78 ccw(c5798.71,2770.08) 5805.01,2770.08 5805.01,2771.68 cw(c5811.31,2771.68) 5811.31,2777.98 5812.71,2777.98 cw(c5812.71,2771.68) 5819.01,2771.68 5819.01,2756 ccw(c5825.31,2756) 5825.31,2749.7 5826.71,2749.7 ccw(c5826.71,2756) 5833.01,2756 5833.01,2771.68 cw(c5839.31,2771.68) 5839.31,2777.98 5840.71,2777.98 cw(c5840.71,2771.68) 5847.01,2771.68 5847.01,2756 ccw(c5853.31,2756) 5853.31,2749.7 5854.71,2749.7 ccw(c5854.71,2756) 5861.01,2756 5861.01,2771.68 cw(c5867.31,2771.68) 5867.31,2777.98 5868.71,2777.98 cw(c5868.71,2771.68) 5875.01,2771.68 5875.01,2770.08 ccw(c5881.31,2770.08) 5881.31,2763.78 5950.35,2763.78 6062.24,2875.68 6062.24,2928.39 v1(6078.74,2944.88)
DQ4: Q1.L22 Q2.H3 | length 925.2
  Top Layer w4: Q1.L22@5461.42,2685.04 5582.68,2685.04 5590.55,2677.17 5590.55,2629.92 5629.92,2590.55 v1(5653.54,2590.55) ; v1(6110.24,2692.91) 6110.24,2779.53 6118.11,2787.4 6141.73,2787.4 6148.37,2794.04 Q2.H3@6157.48,2803.15
  Bottom Layer w4: v1(5653.54,2590.55) 5661.54,2598.55 6016.42,2598.55 6064.79,2646.92 ccw(c6069.45,2652.15) 6074.69,2656.82 cw(c6079.64,2661.77) 6084.59,2666.72 ccw(c6089.54,2671.67) 6094.49,2676.62 6110.24,2692.36 v1(6110.24,2692.91)
DQ5: Q1.J22 Q2.H8 | length 925.2
  Top Layer w4: Q1.J22@5461.42,2748.03 5472.42,2748.03 v1(5480.3,2740.15) ; v1(6141.73,2944.88) Q2.H8@6157.48,2960.63
  Bottom Layer w4: v1(5480.3,2740.15) 5488.17,2732.28 5564.48,2732.28 5611.85,2684.91 5643.52,2684.91 5644.02,2684.42 5663.07,2684.42 5670.32,2677.17 5795.28,2677.17 5818.9,2700.79 5827.47,2700.79 ccw(c5827.47,2707.09) 5833.77,2707.09 5833.77,2710.59 cw(c5840.07,2710.59) 5840.07,2716.89 5841.47,2716.89 cw(c5841.47,2710.59) 5847.77,2710.59 5847.77,2691.92 ccw(c5854.07,2691.92) 5854.07,2685.62 5855.47,2685.62 ccw(c5855.47,2691.92) 5861.77,2691.92 5861.77,2710.59 cw(c5868.07,2710.59) 5868.07,2716.89 5869.47,2716.89 cw(c5869.47,2710.59) 5875.77,2710.59 5875.77,2707.09 ccw(c5882.07,2707.09) 5882.07,2700.79 5913.39,2700.79 5926.11,2713.52 5940.25,2727.65 6125.98,2913.39 6125.98,2929.13 v1(6141.73,2944.88)
DQ6: Q1.L21 Q2.G2 | length 925.2
  Top Layer w4: Q1.L21@5429.92,2685.04 5445.67,2669.29 5559.06,2669.29 5582.55,2645.8 5582.55,2610.86 5618.61,2574.8 v1(5637.8,2574.8) ; Q2.G2@6125.98,2771.65 6141.73,2755.91 v1(6141.73,2692.91)
  Bottom Layer w4: v1(5637.8,2574.8) 5659.01,2574.8 5674.76,2590.55 6040.16,2590.55 6098.31,2648.7 cw(c6104.79,2652.12) 6108.21,2658.6 ccw(c6113.16,2663.55) 6118.11,2668.5 6141.73,2692.12 v1(6141.73,2692.91)
DQ7: Q1.K20 Q2.H7 | length 925.2
  Top Layer w4: Q1.K20@5398.43,2716.54 v1(5414.17,2732.28) ; v1(6141.73,2913.39) Q2.H7@6157.48,2929.13
  Bottom Layer w4: v1(5414.17,2732.28) 5424.46,2732.28 5440.21,2748.03 5440.95,2747.28 5451.88,2747.28 5474.88,2724.28 5561.17,2724.28 5609.04,2676.42 5659.76,2676.42 5667.01,2669.17 5798.59,2669.17 5803.15,2673.73 5839.02,2673.73 cw(c5846.02,2671.96) 5853.02,2673.73 5867.02,2673.73 cw(c5874.02,2673.54) 5881.02,2673.73 5902.07,2673.73 v1(6141.73,2913.39)
DQ8: Q1.E20 Q2.D7 | length 689
  Top Layer w4: Q1.E20@5398.43,2874.02 v1(5414.17,2889.76) ; v1(5874.02,2881.89) 5984.25,2881.89 5992.13,2889.76 cw(c5997.41,2894.38) 6002.03,2899.66 Q2.D7@6031.5,2929.13
  Bottom Layer w4: v1(5414.17,2889.76) 5424.46,2889.76 5440.2,2874.02 5453.54,2874.02 5477.04,2897.51 5826.9,2897.51 5842.52,2881.89 v1(5874.02,2881.89)
DQ9: Q1.D22 Q2.C3 | length 689
  Top Layer w4: Q1.D22@5461.42,2905.51 v1(5485.04,2881.89) ; v1(5874.02,2850.39) 5971.94,2850.39 6000,2822.34 Q2.C3@6000,2803.15
  Bottom Layer w4: v1(5485.04,2881.89) 5492.66,2889.51 5541.63,2889.51 5565,2866.14 ccw(c5565,2872.44) 5571.3,2872.44 5571.3,2883.21 cw(c5577.6,2883.21) 5577.6,2889.51 5579,2889.51 cw(c5579,2883.21) 5585.3,2883.21 5585.3,2872.44 ccw(c5591.6,2872.44) 5591.6,2866.14 5638.5,2866.14 ccw(c5638.5,2872.44) 5644.8,2872.44 5644.8,2874.34 cw(c5651.1,2874.34) 5651.1,2880.64 5652.5,2880.64 cw(c5652.5,2874.34) 5658.8,2874.34 5658.8,2872.44 ccw(c5665.1,2872.44) 5665.1,2866.14 5666.5,2866.14 ccw(c5666.5,2872.44) 5672.8,2872.44 5672.8,2874.34 cw(c5679.1,2874.34) 5679.1,2880.64 5680.5,2880.64 cw(c5680.5,2874.34) 5686.8,2874.34 5686.8,2872.44 ccw(c5693.1,2872.44) 5693.1,2866.14 5694.5,2866.14 ccw(c5694.5,2872.44) 5700.8,2872.44 5700.8,2874.34 cw(c5707.1,2874.34) 5707.1,2880.64 5708.5,2880.64 cw(c5708.5,2874.34) 5714.8,2874.34 5714.8,2872.44 ccw(c5721.1,2872.44) 5721.1,2866.14 5818.9,2866.14 5834.65,2850.39 v1(5874.02,2850.39)
DQ10: Q1.B21 Q2.C8 | length 689
  Top Layer w4: Q1.B21@5429.92,2968.5 5441.8,2968.5 5455.67,2982.38 5467.16,2982.38 v1(5484.79,3000) ; v1(5874.02,3007.87) 5976.38,3007.87 5984.25,3000 5984.25,2976.38 Q2.C8@6000,2960.63
  Bottom Layer w4: v1(5484.79,3000) 5492.66,3007.87 5802.27,3007.87 cw(c5802.27,3000.87) 5809.27,3000.87 5809.27,2999.34 ccw(c5816.27,2999.34) 5816.27,2992.34 ccw(c5816.27,2999.34) 5823.27,2999.34 5823.27,3016.41 cw(c5830.27,3016.41) 5830.27,3023.41 cw(c5830.27,3016.41) 5837.27,3016.41 5837.27,2999.34 ccw(c5844.27,2999.34) 5844.27,2992.34 ccw(c5844.27,2999.34) 5851.27,2999.34 5851.27,3000.87 cw(c5858.27,3000.87) 5858.27,3007.87 v1(5874.02,3007.87)
DQ11: Q1.E22 Q2.C2 | length 689
  Top Layer w4: Q1.E22@5461.42,2874.02 5469.17,2866.27 v1(5535.31,2866.27) ; v1(5897.64,2834.65) 5976.38,2834.65 5984.25,2826.77 5984.25,2787.4 Q2.C2@6000,2771.65
  Bottom Layer w4: v1(5535.31,2866.27) 5543.43,2858.14 5740.16,2858.14 cw(c5740.16,2855.15) 5743.15,2855.15 5743.15,2847.56 ccw(c5746.75,2847.56) 5746.75,2843.96 5747.55,2843.96 ccw(c5747.55,2847.56) 5751.15,2847.56 5751.15,2854.54 cw(c5754.75,2854.54) 5754.75,2858.14 5755.55,2858.14 cw(c5755.55,2854.54) 5759.15,2854.54 5759.15,2850.46 ccw(c5762.75,2850.46) 5762.75,2846.86 5763.55,2846.86 ccw(c5763.55,2850.46) 5767.15,2850.46 5767.15,2854.54 cw(c5770.75,2854.54) 5770.75,2858.14 5771.55,2858.14 cw(c5771.55,2854.54) 5775.15,2854.54 5775.15,2849.67 ccw(c5778.75,2849.67) 5778.75,2846.07 5779.55,2846.07 ccw(c5779.55,2849.67) 5783.15,2849.67 5783.15,2854.54 cw(c5786.75,2854.54) 5786.75,2858.14 5787.55,2858.14 cw(c5787.55,2854.54) 5791.15,2854.54 5791.15,2849.15 ccw(c5794.75,2849.15) 5794.75,2845.55 5795.55,2845.55 ccw(c5795.55,2849.15) 5799.15,2849.15 5799.15,2854.54 cw(c5802.75,2854.54) 5802.75,2858.14 5811.15,2858.14 5834.65,2834.65 5850.14,2834.65 cw(c5854.14,2834.65) 5858.14,2834.65 ccw(c5862.14,2834.65) 5866.14,2834.65 v1(5897.64,2834.65)
DQ12: Q1.D20 Q2.A7 | length 689
  Top Layer w4: Q1.D20@5398.43,2905.51 v1(5414.17,2921.26) ; v1(5897.64,2929.13) Q2.A7@5937.01,2929.13
  Bottom Layer w4: v1(5414.17,2921.26) 5490.6,2921.26 5521.35,2952.01 5574.8,2952.01 5581.8,2945.01 5591.43,2945.01 5598.43,2952.01 5607.05,2952.01 5614.05,2945.01 5625.95,2945.01 5633.45,2952.5 5646.54,2952.5 5653.54,2945.5 5669.99,2945.5 ccw(c5669.99,2951.8) 5676.29,2951.8 5676.29,2953.68 cw(c5682.59,2953.68) 5682.59,2959.98 5683.99,2959.98 cw(c5683.99,2953.68) 5690.29,2953.68 5690.29,2951.8 ccw(c5696.59,2951.8) 5696.59,2945.5 5697.99,2945.5 ccw(c5697.99,2951.8) 5704.29,2951.8 5704.29,2953.68 cw(c5710.59,2953.68) 5710.59,2959.98 5711.99,2959.98 cw(c5711.99,2953.68) 5718.29,2953.68 5718.29,2951.8 ccw(c5724.59,2951.8) 5724.59,2945.5 5725.99,2945.5 ccw(c5725.99,2951.8) 5732.29,2951.8 5732.29,2953.68 cw(c5738.59,2953.68) 5738.59,2959.98 5739.99,2959.98 cw(c5739.99,2953.68) 5746.29,2953.68 5746.29,2951.8 ccw(c5752.59,2951.8) 5752.59,2945.5 5753.99,2945.5 ccw(c5753.99,2951.8) 5760.29,2951.8 5760.29,2953.68 cw(c5766.59,2953.68) 5766.59,2959.98 5767.99,2959.98 cw(c5767.99,2953.68) 5774.29,2953.68 5774.29,2951.8 ccw(c5780.59,2951.8) 5780.59,2945.5 5781.99,2945.5 ccw(c5781.99,2951.8) 5788.29,2951.8 5788.29,2953.68 cw(c5794.59,2953.68) 5794.59,2959.98 5795.99,2959.98 cw(c5795.99,2953.68) 5802.29,2953.68 5802.29,2951.8 ccw(c5808.59,2951.8) 5808.59,2945.5 5809.99,2945.5 ccw(c5809.99,2951.8) 5816.29,2951.8 5816.29,2953.68 cw(c5822.59,2953.68) 5822.59,2959.98 5823.99,2959.98 cw(c5823.99,2953.68) 5830.29,2953.68 5830.29,2949.86 ccw(c5834.65,2949.86) 5834.65,2945.5 5849.77,2945.5 5866.14,2929.13 v1(5897.64,2929.13)
DQ13: Q1.F22 Q2.A2 | length 689
  Top Layer w4: Q1.F22@5461.42,2842.52 5477.69,2842.52 ccw(c5484.69,2846.35) 5491.69,2842.52 cw(c5498.69,2842.52) 5505.69,2842.52 5519.69,2842.52 5566.93,2795.28 5574.8,2795.28 v1(5582.68,2803.15) ; v1(5897.64,2803.15) 5905.51,2803.15 Q2.A2@5937.01,2771.65
  Bottom Layer w4: v1(5582.68,2803.15) 5590.55,2795.28 5606.95,2795.28 ccw(c5606.95,2798.88) 5610.55,2798.88 5610.55,2807.3 cw(c5614.15,2807.3) 5614.15,2810.9 5614.95,2810.9 cw(c5614.95,2807.3) 5618.55,2807.3 5618.55,2798.88 ccw(c5622.15,2798.88) 5622.15,2795.28 5629.03,2788.4 5647.83,2788.4 5654.7,2795.28 ccw(c5654.7,2798.88) 5658.3,2798.88 5658.3,2801.68 cw(c5661.9,2801.68) 5661.9,2805.28 5662.7,2805.28 cw(c5662.7,2801.68) 5666.3,2801.68 5666.3,2798.88 ccw(c5669.9,2798.88) 5669.9,2795.28 5670.7,2795.28 ccw(c5670.7,2798.88) 5674.3,2798.88 5674.3,2801.68 cw(c5677.9,2801.68) 5677.9,2805.28 5678.7,2805.28 cw(c5678.7,2801.68) 5682.3,2801.68 5682.3,2798.88 ccw(c5685.9,2798.88) 5685.9,2795.28 5686.7,2795.28 ccw(c5686.7,2798.88) 5690.3,2798.88 5690.3,2801.68 cw(c5693.9,2801.68) 5693.9,2805.28 5694.7,2805.28 cw(c5694.7,2801.68) 5698.3,2801.68 5698.3,2798.88 ccw(c5701.9,2798.88) 5701.9,2795.28 5702.7,2795.28 ccw(c5702.7,2798.88) 5706.3,2798.88 5706.3,2801.68 cw(c5709.9,2801.68) 5709.9,2805.28 5710.7,2805.28 cw(c5710.7,2801.68) 5714.3,2801.68 5714.3,2798.88 ccw(c5717.9,2798.88) 5717.9,2795.28 5718.7,2795.28 ccw(c5718.7,2798.88) 5722.3,2798.88 5722.3,2801.68 cw(c5725.9,2801.68) 5725.9,2805.28 5726.7,2805.28 cw(c5726.7,2801.68) 5730.3,2801.68 5730.3,2797.26 ccw(c5732.28,2797.26) 5732.28,2795.28 5740.16,2795.28 5748.03,2803.15 5756.03,2803.15 ccw(c5760.03,2803.15) 5764.03,2803.15 cw(c5768.03,2803.15) 5772.03,2803.15 5780.03,2803.15 cw(c5784.03,2803.15) 5788.03,2803.15 ccw(c5792.03,2803.15) 5796.03,2803.15 cw(c5800.03,2803.15) 5804.03,2803.15 ccw(c5808.03,2803.15) 5812.03,2803.15 cw(c5816.03,2803.15) 5820.03,2803.15 ccw(c5824.03,2803.15) 5828.03,2803.15 cw(c5832.03,2803.15) 5836.03,2803.15 ccw(c5840.03,2803.15) 5844.03,2803.15 cw(c5848.03,2803.15) 5852.03,2803.15 ccw(c5856.03,2803.15) 5860.03,2803.15 5868.03,2803.15 ccw(c5872.03,2803.15) 5876.03,2803.15 v1(5897.64,2803.15)
DQ14: Q1.C20 Q2.B8 | length 689
  Top Layer w4: Q1.C20@5398.43,2937.01 v1(5414.17,2952.76) ; v1(5874.02,2944.88) 5952.76,2944.88 Q2.B8@5968.5,2960.63
  Bottom Layer w4: v1(5414.17,2952.76) 5461.42,2952.76 5477.17,2968.5 5632.46,2968.5 5639.46,2975.5 5655.08,2975.5 5655.2,2975.63 5667.63,2975.63 5674.76,2968.5 5709.36,2968.5 ccw(c5709.36,2974.8) 5715.66,2974.8 5715.66,2980.01 cw(c5721.96,2980.01) 5721.96,2986.31 5723.36,2986.31 cw(c5723.36,2980.01) 5729.66,2980.01 5729.66,2974.8 ccw(c5735.96,2974.8) 5735.96,2968.5 5737.36,2968.5 ccw(c5737.36,2974.8) 5743.66,2974.8 5743.66,2980.01 cw(c5749.96,2980.01) 5749.96,2986.31 5751.36,2986.31 cw(c5751.36,2980.01) 5757.66,2980.01 5757.66,2974.8 ccw(c5763.96,2974.8) 5763.96,2968.5 5765.36,2968.5 ccw(c5765.36,2974.8) 5771.66,2974.8 5771.66,2980.01 cw(c5777.96,2980.01) 5777.96,2986.31 5779.36,2986.31 cw(c5779.36,2980.01) 5785.66,2980.01 5785.66,2974.8 ccw(c5791.96,2974.8) 5791.96,2968.5 5866.14,2968.5 5874.02,2960.63 v1(5874.02,2944.88)
DQ15: Q1.F21 Q2.A3 | length 689
  Top Layer w4: Q1.F21@5429.92,2842.52 5445.67,2858.27 5519.69,2858.27 5559.06,2818.9 v1(5566.93,2818.9) ; v1(5874.02,2818.9) 5929.13,2818.9 5937.01,2811.02 Q2.A3@5937.01,2803.15
  Bottom Layer w4: v1(5566.93,2818.9) 5622.05,2818.9 5629.8,2811.15 5645.8,2811.15 5653.54,2818.9 5685.04,2818.9 cw(c5692.04,2818.42) 5699.04,2818.9 ccw(c5706.04,2819.95) 5713.04,2818.9 5717.24,2818.9 ccw(c5717.24,2825.2) 5723.54,2825.2 5723.54,2832.04 cw(c5729.84,2832.04) 5729.84,2838.34 5731.24,2838.34 cw(c5731.24,2832.04) 5737.54,2832.04 5737.54,2817.2 ccw(c5743.84,2817.2) 5743.84,2810.9 5745.24,2810.9 ccw(c5745.24,2817.2) 5751.54,2817.2 5751.54,2832.04 cw(c5757.84,2832.04) 5757.84,2838.34 5759.24,2838.34 cw(c5759.24,2832.04) 5765.54,2832.04 5765.54,2825.2 ccw(c5771.84,2825.2) 5771.84,2818.9 5773.24,2818.9 ccw(c5773.24,2825.2) 5779.54,2825.2 5779.54,2832.04 cw(c5785.84,2832.04) 5785.84,2838.34 5787.24,2838.34 cw(c5787.24,2832.04) 5793.54,2832.04 5793.54,2825.2 ccw(c5799.84,2825.2) 5799.84,2818.9 5801.24,2818.9 ccw(c5801.24,2825.2) 5807.54,2825.2 5807.54,2832.04 cw(c5813.84,2832.04) 5813.84,2838.34 5815.24,2838.34 cw(c5815.24,2832.04) 5821.54,2832.04 5821.54,2825.2 ccw(c5827.84,2825.2) 5827.84,2818.9 v1(5874.02,2818.9)
DQ16: Q1.M22 Q3.G2 | length 1240.2
  Top Layer w4: Q1.M22@5461.42,2653.54 5558.93,2653.54 5574.55,2637.92 5574.55,2607.55 5629.92,2552.18 5629.92,2149.61 5691.69,2087.84 ccw(c5701.69,2080.87) 5708.66,2070.87 v1(5748.03,2031.5) ; Q3.G2@6125.98,2086.61 v1(6141.73,2070.87)
  Bottom Layer w4: v1(5748.03,2031.5) 6102.36,2031.5 v1(6141.73,2070.87)
DQ17: Q1.T21 Q3.F7 | length 1240.2
  Top Layer w4: Q1.T21@5429.92,2527.56 5445.67,2511.81 5559.06,2511.81 5574.56,2496.31 5574.56,2261.36 v1(5573.92,2260.72) ; v1(6078.74,2259.84) Q3.F7@6094.49,2244.09
  Bottom Layer w4: v1@5582.68,2259.84 5906.21,2259.84 ccw(c5906.21,2266.14) 5912.51,2266.14 5912.51,2280.09 cw(c5918.81,2280.09) 5918.81,2286.39 5920.21,2286.39 cw(c5920.21,2280.09) 5926.51,2280.09 5926.51,2239.6 ccw(c5932.81,2239.6) 5932.81,2233.3 5934.21,2233.3 ccw(c5934.21,2239.6) 5940.51,2239.6 5940.51,2280.09 cw(c5946.81,2280.09) 5946.81,2286.39 5948.21,2286.39 cw(c5948.21,2280.09) 5954.51,2280.09 5954.51,2239.6 ccw(c5960.81,2239.6) 5960.81,2233.3 5962.21,2233.3 ccw(c5962.21,2239.6) 5968.51,2239.6 5968.51,2280.09 cw(c5974.81,2280.09) 5974.81,2286.39 5976.21,2286.39 cw(c5976.21,2280.09) 5982.51,2280.09 5982.51,2239.6 ccw(c5988.81,2239.6) 5988.81,2233.3 5990.21,2233.3 ccw(c5990.21,2239.6) 5996.51,2239.6 5996.51,2280.09 cw(c6002.81,2280.09) 6002.81,2286.39 6004.21,2286.39 cw(c6004.21,2280.09) 6010.51,2280.09 6010.51,2266.14 ccw(c6016.81,2266.14) 6016.81,2259.84 v1(6078.74,2259.84)
DQ18: Q1.T22 Q3.F2 | length 1240.2
  Top Layer w4: Q1.T22@5461.42,2527.56 5566.3,2527.56 5589.68,2504.18 5589.68,2140.86 5566.93,2118.11 v1(5566.93,2047.24) ; Q3.F2@6094.49,2086.61 v1(6110.24,2070.87)
  Bottom Layer w4: v1(5566.93,2047.24) 5590.54,2047.24 ccw(c5597.54,2049.47) 5604.54,2047.24 cw(c5611.54,2047.24) 5618.54,2047.24 ccw(c5625.54,2047.24) 5632.54,2047.24 cw(c5639.54,2047.24) 5646.54,2047.24 ccw(c5653.54,2047.24) 5660.54,2047.24 5674.54,2047.24 ccw(c5681.54,2047.24) 5688.54,2047.24 cw(c5695.54,2047.24) 5702.54,2047.24 ccw(c5709.54,2047.24) 5716.54,2047.24 6086.61,2047.24 v1(6110.24,2070.87)
DQ19: Q1.T20 Q3.F8 | length 1240.2
  Top Layer w4: Q1.T20@5398.43,2527.56 v1(5414.17,2511.81) ; v1(6078.74,2354.33) 6078.74,2291.34 Q3.F8@6094.49,2275.59
  Bottom Layer w4: v1(5414.17,2511.81) 5421.92,2504.06 5491.5,2504.06 5577.86,2417.7 5698,2417.7 5707.91,2407.79 5707.91,2404.73 5718.94,2393.7 5732.98,2393.7 ccw(c5732.98,2400) 5739.28,2400 5739.28,2406.81 cw(c5745.58,2406.81) 5745.58,2413.11 5746.98,2413.11 cw(c5746.98,2406.81) 5753.28,2406.81 5753.28,2380.34 ccw(c5759.58,2380.34) 5759.58,2374.04 5760.98,2374.04 ccw(c5760.98,2380.34) 5767.28,2380.34 5767.28,2407.06 cw(c5773.58,2407.06) 5773.58,2413.36 5774.98,2413.36 cw(c5774.98,2407.06) 5781.28,2407.06 5781.28,2380.34 ccw(c5787.58,2380.34) 5787.58,2374.04 5788.98,2374.04 ccw(c5788.98,2380.34) 5795.28,2380.34 5795.28,2407.06 cw(c5801.58,2407.06) 5801.58,2413.36 5802.98,2413.36 cw(c5802.98,2407.06) 5809.28,2407.06 5809.28,2380.34 ccw(c5815.58,2380.34) 5815.58,2374.04 5816.98,2374.04 ccw(c5816.98,2380.34) 5823.28,2380.34 5823.28,2407.06 cw(c5829.58,2407.06) 5829.58,2413.36 5830.98,2413.36 cw(c5830.98,2407.06) 5837.28,2407.06 5837.28,2380.34 ccw(c5843.58,2380.34) 5843.58,2374.04 5844.98,2374.04 ccw(c5844.98,2380.34) 5851.28,2380.34 5851.28,2407.06 cw(c5857.58,2407.06) 5857.58,2413.36 5858.98,2413.36 cw(c5858.98,2407.06) 5865.28,2407.06 5865.28,2380.34 ccw(c5871.58,2380.34) 5871.58,2374.04 5872.98,2374.04 ccw(c5872.98,2380.34) 5879.28,2380.34 5879.28,2407.06 cw(c5885.58,2407.06) 5885.58,2413.36 5886.98,2413.36 cw(c5886.98,2407.06) 5893.28,2407.06 5893.28,2380.34 ccw(c5899.58,2380.34) 5899.58,2374.04 5900.98,2374.04 ccw(c5900.98,2380.34) 5907.28,2380.34 5907.28,2387.4 cw(c5913.58,2387.4) 5913.58,2393.7 6039.37,2393.7 6068.13,2364.94 v1(6078.74,2354.33)
DQ20: Q1.R22 Q3.H3 | length 1240.2
  Top Layer w4: Q1.R22@5461.42,2559.05 5563.49,2559.05 5597.68,2524.87 5597.68,2137.05 5591.3,2130.68 5591.3,2063.74 v1(5590.55,2062.99) ; v1(6141.73,2133.86) Q3.H3@6157.48,2118.11
  Bottom Layer w4: v1(5590.55,2062.99) 5637.8,2062.99 cw(c5644.8,2062.99) 5651.8,2062.99 ccw(c5658.8,2062.99) 5665.8,2062.99 cw(c5672.8,2061.94) 5679.8,2062.99 6070.87,2062.99 v1(6141.73,2133.86)
DQ21: Q1.N20 Q3.H8 | length 1240.2
  Top Layer w4: Q1.N20@5398.43,2622.05 v1(5414.17,2606.3) ; v1(6141.73,2291.34) Q3.H8@6157.48,2275.59
  Bottom Layer w4: v1(5414.17,2606.3) 5543.31,2606.3 5550.05,2599.56 5550.05,2532.13 5602.12,2480.06 5747.77,2480.06 5763.4,2495.68 5899.05,2495.68 5927.02,2467.71 5991.39,2467.71 5993.79,2465.32 6006.21,2465.32 6008.33,2467.43 6018.61,2467.43 6023.62,2472.44 6023.62,2535.43 6047.24,2559.06 6061.94,2559.06 cw(c6061.94,2552.76) 6068.24,2552.76 6068.24,2541.53 ccw(c6074.54,2541.53) 6074.54,2535.23 6075.94,2535.23 ccw(c6075.94,2541.53) 6082.24,2541.53 6082.24,2552.76 cw(c6088.54,2552.76) 6088.54,2559.06 6102.36,2559.06 6133.86,2527.56 6133.86,2433.07 6133.86,2362.2 6141.73,2354.33 v1(6141.73,2291.34)
DQ22: Q1.M21 Q3.E3 | length 1240.2
  Top Layer w4: Q1.M21@5429.92,2653.54 5445.67,2637.8 5558.8,2637.8 5566.55,2630.05 5566.55,2604.23 5621.92,2548.86 5621.92,2141.73 5645.67,2117.98 v1(5645.67,2102.36) ; v1(6047.24,2133.86) Q3.E3@6062.99,2118.11
  Bottom Layer w4: v1(5645.67,2102.36) 5653.42,2110.11 5763.91,2110.11 5779.4,2094.61 5808.1,2094.61 ccw(c5808.1,2100.91) 5814.4,2100.91 cw(c5820.7,2100.91) 5820.7,2107.21 5822.1,2107.21 cw(c5822.1,2100.91) 5828.4,2100.91 ccw(c5834.7,2100.91) 5834.7,2094.61 5836.1,2094.61 ccw(c5836.1,2100.91) 5842.4,2100.91 cw(c5848.7,2100.91) 5848.7,2107.21 5850.1,2107.21 cw(c5850.1,2100.91) 5856.4,2100.91 ccw(c5862.7,2100.91) 5862.7,2094.61 5867.86,2094.61 ccw(c5867.86,2097.15) 5870.4,2097.15 cw(c5876.7,2097.15) 5876.7,2103.45 5878.1,2103.45 cw(c5878.1,2097.15) 5884.4,2097.15 ccw(c5886.94,2097.15) 5886.94,2094.61 5892.1,2094.61 ccw(c5892.1,2100.91) 5898.4,2100.91 5898.4,2104.91 cw(c5904.7,2104.91) 5904.7,2111.21 5906.1,2111.21 cw(c5906.1,2104.91) 5912.4,2104.91 5912.4,2100.91 ccw(c5918.7,2100.91) 5918.7,2094.61 5920.1,2094.61 ccw(c5920.1,2100.91) 5926.4,2100.91 5926.4,2104.91 cw(c5932.7,2104.91) 5932.7,2111.21 5934.1,2111.21 cw(c5934.1,2104.91) 5940.4,2104.91 5940.4,2100.91 ccw(c5946.7,2100.91) 5946.7,2094.61 6008,2094.61 v1(6047.24,2133.86)